# Altium PCB TOP-010.PcbDoc
Units mil, origin at the board's own origin, x right, y up, seen from the top; angles counter-clockwise.
Board outline 1750 x 1750 mil, 2 copper layers (L1 - Top Layer, L4 - Bottom Layer), stack 62.8 mil thick; 2 components, 39 nets, 128 pads, 92 vias.
Unrouted connection lines stored in the file: 4.
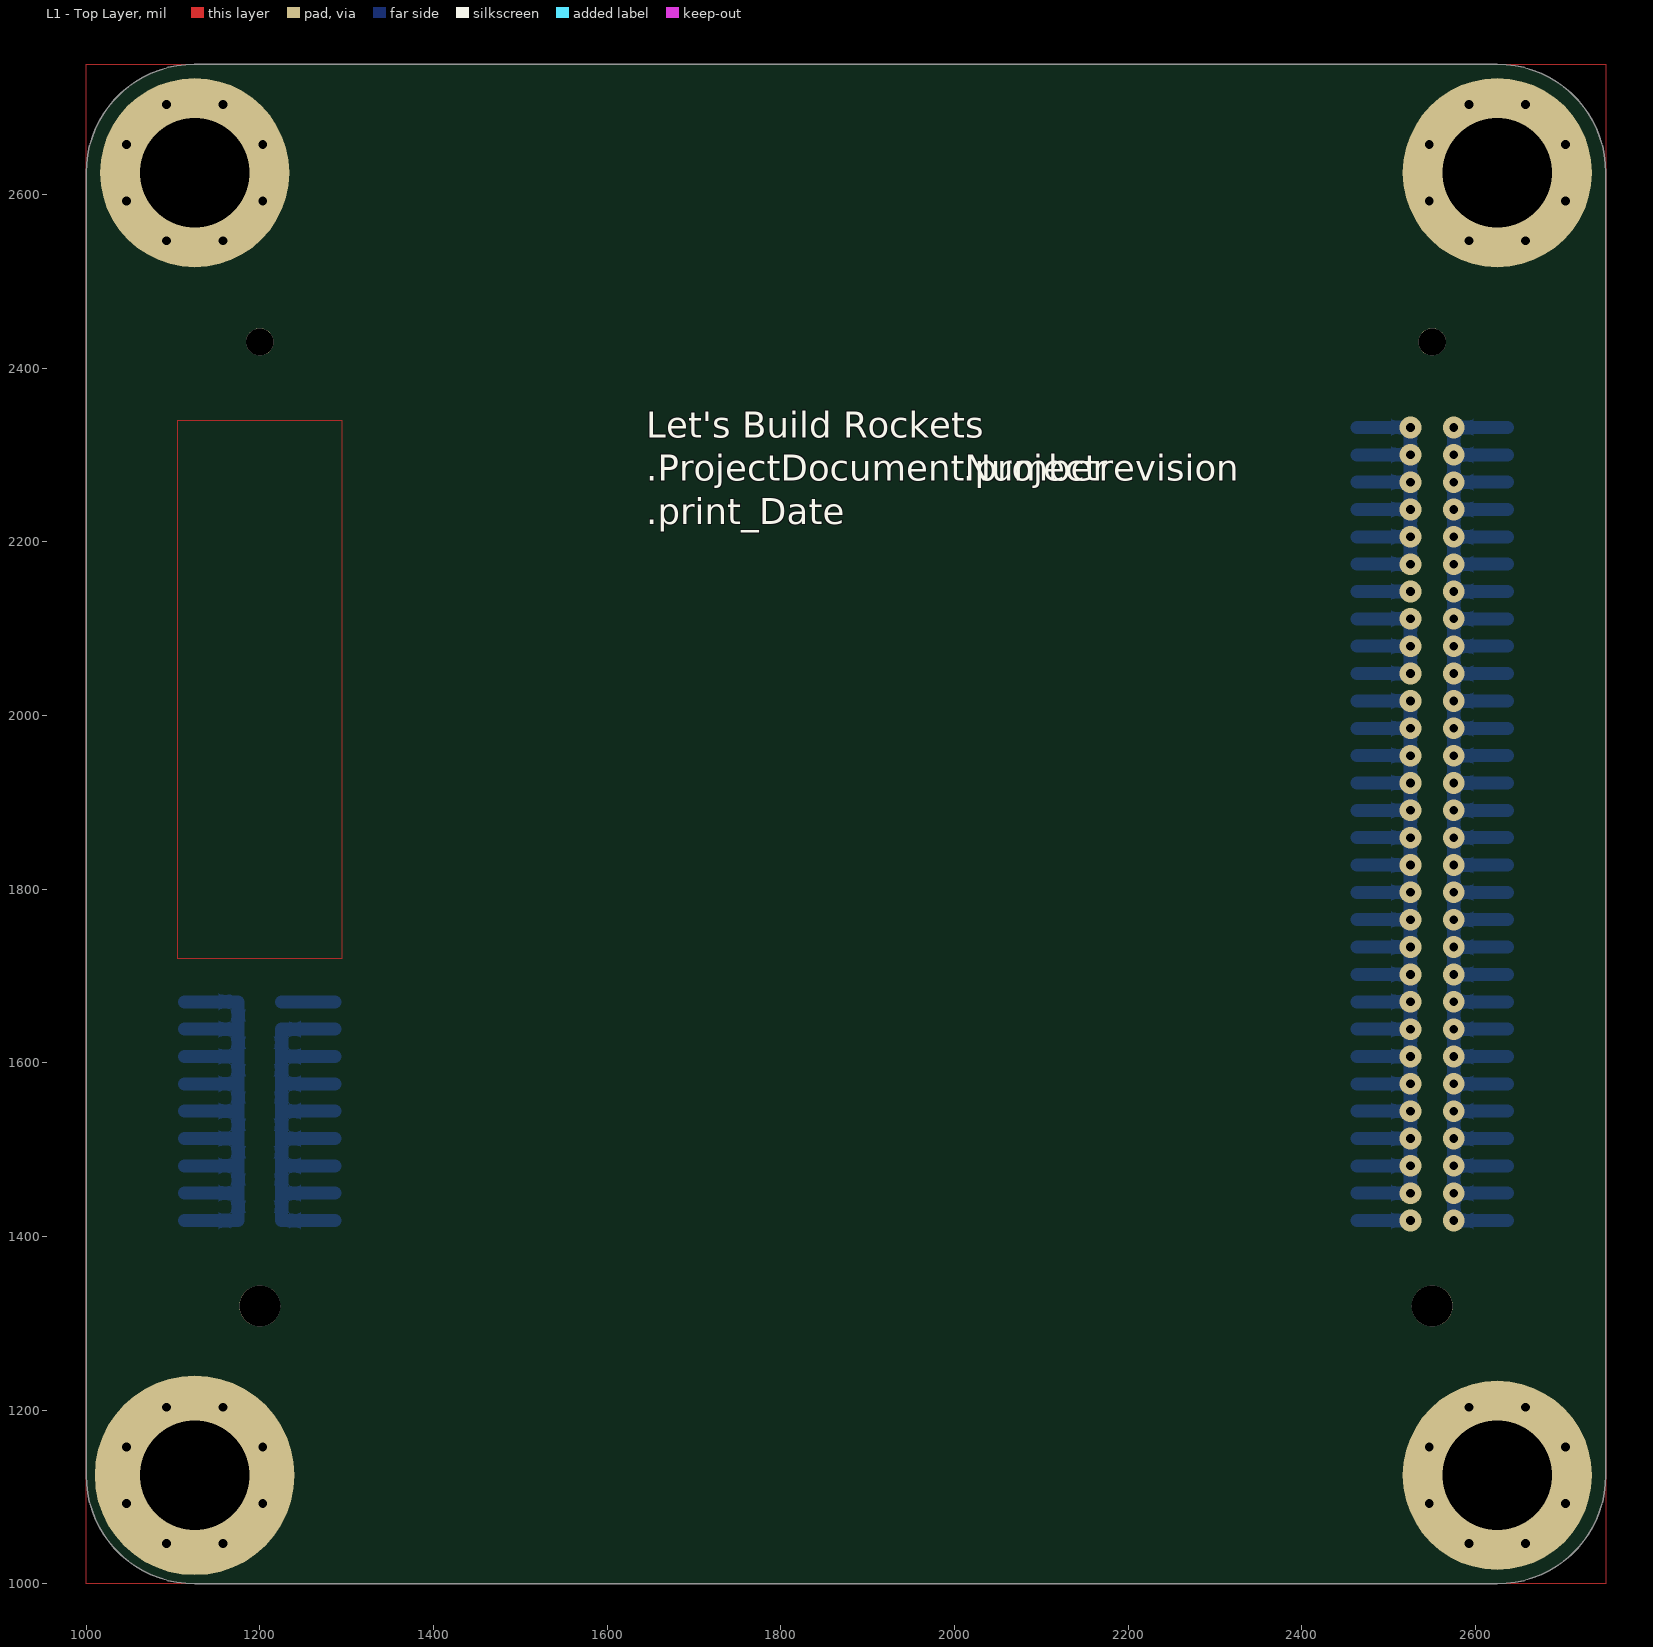
[diagram p0: L1 - Top Layer view]
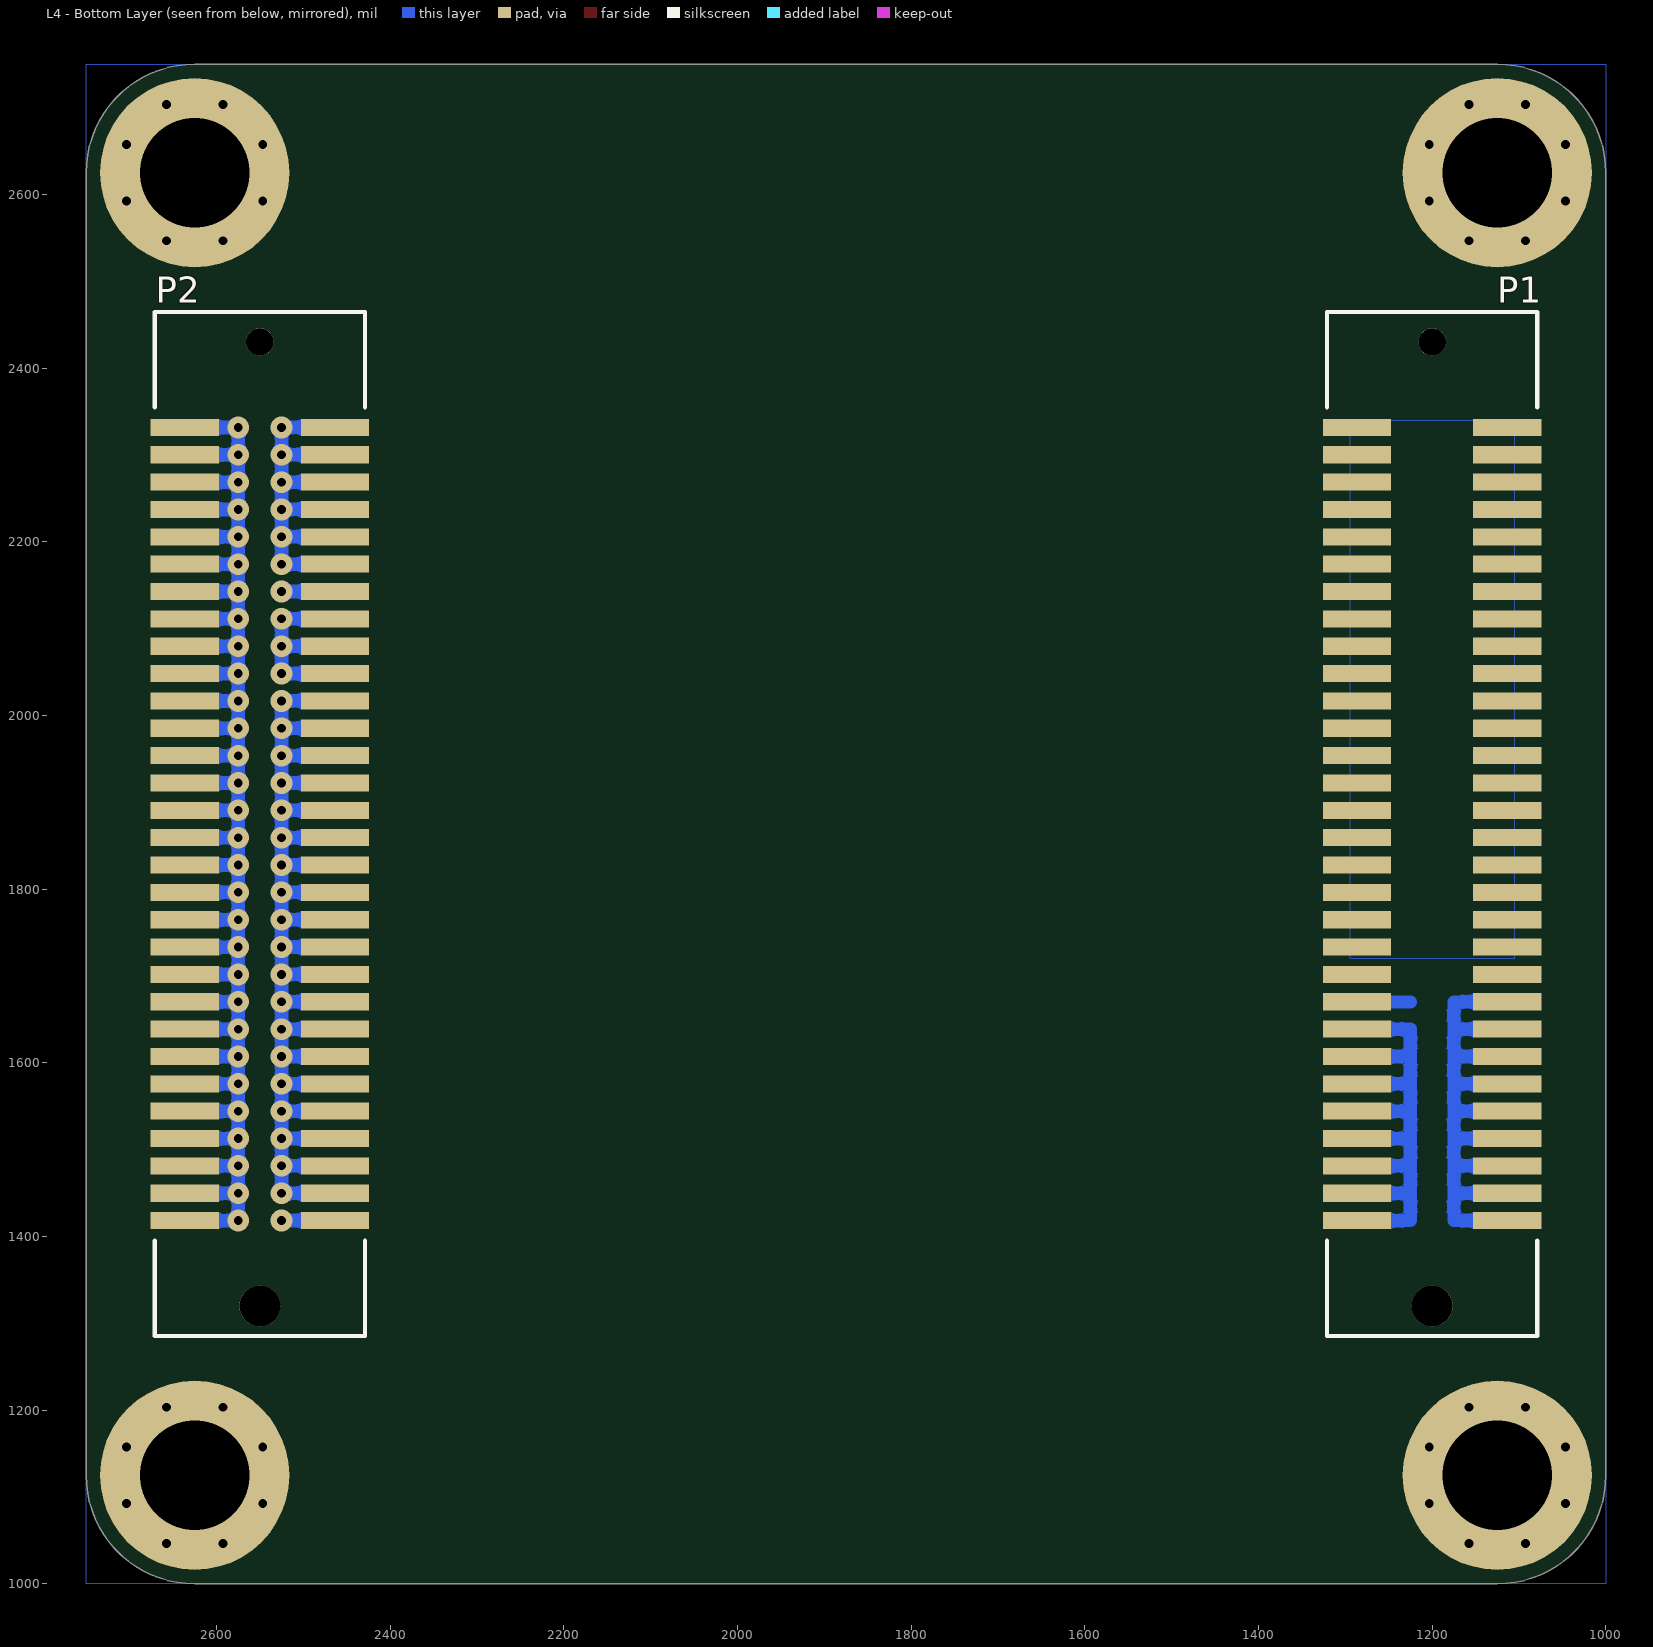
[diagram p1: L4 - Bottom Layer view, seen from below]

## Layer stack, top to bottom
Top Solder: solder mask 0.5, Solder Resist, Dk 3.8
L1 - Top Layer: signal copper 1.4
Dielectric 1: core 60, Core-043, Dk 4.3
L4 - Bottom Layer: signal copper 1.4
Bottom Solder: solder mask 0.5, Solder Resist, Dk 3.8

## Board outline
1000,1125 1000,2625 cw(c1125,2625) 1125,2750 2625,2750 cw(c2625,2625) 2750,2625 2750,1125 cw(c2625,1125) 2625,1000 1125,1000 cw(c1125,1125)

## Design rules (kind name [scope] priority, off if disabled: settings)
AssemblyTestPointUsage AssemblyTestPointUsage_1 [All] p2:
AssemblyTestpoint AssemblyTestpoint_1 [All] p2: testpointundercomponent=TRUE minsize=40 maxsize=100 preferedsize=60 minholesize=0 maxholesize=40 preferedholesize=32 testpointgrid=1 usegrid=TRUE gridtolerance=0.01 allowsidetop=TRUE allowsidebottom=TRUE
BoardOutlineClearance [All] p1: gap=10 ignorepadtopadclearanceinfootprint=FALSE except(0: Arc-SplitContinuation Track-SplitContinuation SMDPad-SplitContinuation THPad-SplitContinuation Via-SplitContinuation Fill-SplitContinuation Poly-SplitContinuation Region-SplitContinuation Text-SplitContinuation)
Clearance Clearance_HV [InNetClass('HIghVoltage')] p1: gap=6 ignorepadtopadclearanceinfootprint=FALSE except(10: Arc-Poly Track-Poly SMDPad-Poly THPad-Poly Via-Poly Fill-Poly Poly-Poly Poly-Region Poly-Text Poly-Hole)
Clearance [All] p2: gap=5 ignorepadtopadclearanceinfootprint=FALSE except(8: Arc-Poly Track-Poly SMDPad-Poly THPad-Poly Via-Poly Fill-Poly Poly-Poly Poly-Region Poly-Text Poly-Hole)
DiffPairsRouting [All] p1: maxlimit=5 minlimit=5 mostfreqgap=5 toplayer_minwidth=5 toplayer_maxwidth=5 toplayer_prefwidth=5 bottomlayer_minwidth=5 bottomlayer_maxwidth=5 bottomlayer_prefwidth=5 impedanceprofiledriven=TRUE impedanceprofileid={FBA8A629-7972-4F76-A7E5-5756DC662DF8} impedanceprofilevalue=100.000000 maxuncoupledlength=500
FabricationTestPointUsage FabricationTestPointUsage_1 [All] p2: valid=0 allowmultiple=FALSE
FabricationTestpoint FabricationTestpoint_1 [All] p2: side=3 testpointundercomponent=TRUE minsize=40 maxsize=100 preferedsize=60 minholesize=0 maxholesize=40 preferedholesize=32 testpointgrid=1 allowsidetop=TRUE allowsidebottom=TRUE usegrid=TRUE gridtolerance=0.01
FanoutControl Fanout_LCC [IsLCC] p1: bgadir=Out bgaviamode=Centered fanoutstyle=Auto fanoutdirection=Alternating viagrid=1 // Fanout_LCC (Default Rule)
FanoutControl Fanout_BGA [IsBGA] p2: bgadir=Out bgaviamode=Centered fanoutstyle=Auto fanoutdirection=Alternating viagrid=1 // Fanout_BGA (Default Rule)
FanoutControl Fanout_Default [All] p4: bgadir=Out bgaviamode=Centered fanoutstyle=Auto fanoutdirection=Alternating viagrid=1 // Fanout_Default (Default Rule)
FanoutControl Fanout_Small [(CompPinCount < 5)] p5: bgadir=Out bgaviamode=Centered fanoutstyle=Auto fanoutdirection=OutThenIn viagrid=1 // Fanout_Small (Default Rule)
FanoutControl Fanout_BGA_1 [IsBGA] p6: bgadir=Out bgaviamode=Centered fanoutstyle=Auto fanoutdirection=Alternating viagrid=1 // Fanout_BGA (Default Rule)
FanoutControl Fanout_LCC_1 [IsLCC] p7: bgadir=Out bgaviamode=Centered fanoutstyle=Auto fanoutdirection=Alternating viagrid=1 // Fanout_LCC (Default Rule)
FanoutControl Fanout_SOIC_1 [IsSOIC] p8: bgadir=Out bgaviamode=Centered fanoutstyle=Auto fanoutdirection=Alternating viagrid=1 // Fanout_SOIC (Default Rule)
FanoutControl Fanout_Small_1 [(CompPinCount < 5)] p9: bgadir=Out bgaviamode=Centered fanoutstyle=Auto fanoutdirection=OutThenIn viagrid=1 // Fanout_Small (Default Rule)
FanoutControl Fanout_Default_1 [All] p10: bgadir=Out bgaviamode=Centered fanoutstyle=Auto fanoutdirection=Alternating viagrid=1 // Fanout_Default (Default Rule)
Height Height_Bottom [TouchesRoom('BoardHeight_Bottom') and OnBottom and not ((Name='J1') or (Name='J2') or (Name='P1') or (Name='P2') )] p1: minheight=0 maxheight=152 prefheight=0
Height Height_Top [TouchesRoom('BoardHeight_Top') and OnTop and not ((Name='J1') or (Name='J2') or (Name='P1') or (Name='P2') )] p2: minheight=0 maxheight=310 prefheight=0
HoleSize [All] p1: absolutevalues=TRUE maxlimit=130 minlimit=10 maxpercent=80.000 minpercent=20.000
MinimumSolderMaskSliver [All] p1: minsoldermaskwidth=3
PlaneClearance [All] p1: clearance=10
PlaneConnect [All] p1: pad.planeconnectstyle=Relief pad.reliefexpansion=10 pad.reliefentries=4 pad.reliefconductorwidth=10 pad.reliefairgap=10 via.planeconnectstyle=Direct via.reliefexpansion=20 via.reliefentries=4 via.reliefconductorwidth=10 via.reliefairgap=10
PolygonConnect [All] p1: thpad.connectstyle=Relief thpad.reliefconductorwidth=10 thpad.reliefentries=4 thpad.polygonreliefangle="90 Angle" thpad.airgapwidth=10 smdpad.connectstyle=Relief smdpad.reliefconductorwidth=9 smdpad.reliefentries=4 smdpad.polygonreliefangle="90 Angle" smdpad.airgapwidth=5 via.connectstyle=Direct via.reliefconductorwidth=10 via.reliefentries=4 via.polygonreliefangle="90 Angle" via.airgapwidth=10
RoomDefinition BoardHeight_Top [False] p1: confinementstyle=ConfineIn formatcopy=TRUE lockcomponents=FALSE outline 2750,2750 1000,2750 1000,1000 2750,1000
RoomDefinition BoardHeight_Bottom [False] p2: confinementstyle=ConfineIn formatcopy=TRUE lockcomponents=FALSE outline 1000,2750 2750,2750 2750,1000 1000,1000
RoutingVias [All] p1: holewidth=10 width=25 viastyle="Through Hole" minholewidth=10 minwidth=25 maxholewidth=28 maxwidth=50
SilkToBoardRegionClearance SilkToBoardRegionClearance_1 [All] p2:
SilkToSilkClearance [All] p1: silktosilkclearance=2
SilkToSolderMaskClearance [IsPad] p1: minsilkscreentomaskgap=4 clearancetoexposedcopper=TRUE
SolderMaskExpansion [All] p1: expansion=2 istentingtop=FALSE
UnRoutedNet [All] p1: checkbadconnections=TRUE
Width [All] p1: maxlimit=25 minlimit=5 preferedwidth=10 minimp=50.000000 maximp=50.000000 favimp=50.000000
17 further rules are at their usual default settings.

## Components (designator, comment, footprint, x,y, rotation, side; value= is the part's Value field where it differs from the comment)
P1 "10144518-064802LF" 10144518-064802LF 1200,1875 r270 bottom locked
P2 "10144518-064802LF" 10144518-064802LF 2550,1875 r270 bottom locked

## Footprints (in the part's own frame and the unit in brackets; to place one, negate y for a bottom-side part, rotate by r counter-clockwise, add the part's x,y. Pads: shape width x height; smd on the part's side, far side on the other; paste and mask are expansions set on the pad)
10144518-064802LF [mm]
  rect 0.5x2 smd: 1(-11.6,2.2) 2(-11.6,-2.2) 3(-10.8,2.2) 4(-10.8,-2.2) 5(-10,2.2) 6(-10,-2.2) 7(-9.2,2.2) 8(-9.2,-2.2) 9(-8.4,2.2) 10(-8.4,-2.2) 11(-7.6,2.2) 12(-7.6,-2.2) 13(-6.8,2.2) 14(-6.8,-2.2) 15(-6,2.2) 16(-6,-2.2) 17(-5.2,2.2) 18(-5.2,-2.2) 19(-4.4,2.2) 20(-4.4,-2.2) 21(-3.6,2.2) 22(-3.6,-2.2) 23(-2.8,2.2) 24(-2.8,-2.2) 25(-2,2.2) 26(-2,-2.2) 27(-1.2,2.2) 28(-1.2,-2.2) 29(-0.4,2.2) 30(-0.4,-2.2) 31(0.4,2.2) 32(0.4,-2.2) 33(1.2,2.2) 34(1.2,-2.2) 35(2,2.2) 36(2,-2.2) 37(2.8,2.2) 38(2.8,-2.2) 39(3.6,2.2) 40(3.6,-2.2) 41(4.4,2.2) 42(4.4,-2.2) 43(5.2,2.2) 44(5.2,-2.2) 45(6,2.2) 46(6,-2.2) 47(6.8,2.2) 48(6.8,-2.2) 49(7.6,2.2) 50(7.6,-2.2) 51(8.4,2.2) 52(8.4,-2.2) 53(9.2,2.2) 54(9.2,-2.2) 55(10,2.2) 56(10,-2.2) 57(10.8,2.2) 58(10.8,-2.2) 59(11.6,2.2) 60(11.6,-2.2)
  round 0.8 hole 0.8 unplated: M1(-14.1,0)
  round 1.2 hole 1.2 unplated: M2(14.1,0)
  silkscreen extent -14.97,-3.08 14.97,3.08, body extent -14.9,-3 14.9,3, height 7.65

## Part data
P1 P2: Unit Price (USD)=1.52

## Free pads (board coordinates)
  round 230 / inner round 218 / far side round 218 hole 125.98: 0(1125,1125)
  round 218 hole 125.98: 0(1125,2625) 0(2625,1125) 0(2625,2625)

## Via types
v1: diameter 25, hole 10, L1 - Top Layer to L4 - Bottom Layer, tented both sides, 92 vias

## Nets (pads, with @x,y where several pads share a name; then routed paths per layer and width w, separated by ;. In a path a pad name is that pad's centre, name@x,y a point inside that pad or via, vN(x,y) a via of type N, cw(c..) or ccw(c..) an arc to the next point about the centre after c; other vN are vias at no path point)
+0.9V_REF: P1.42
+5V: P1.46 P1.48 P1.50 P1.52 P1.54 P1.56 P1.58 P1.60 | length 713.4
  L4 - Bottom Layer w15: P1.60 1225,1418.31 1225,1449.8 ; P1.58 1225,1449.8 ; P1.56 1225,1481.3 ; P1.54 1225,1512.8 ; P1.52 1225,1544.29 ; P1.50 1225,1575.79 ; P1.48 1225,1607.28 ; P1.46 1225,1638.78 1225,1607.28 ; 1225,1449.8 1225,1481.3 ; 1225,1481.3 1225,1512.8 ; 1225,1512.8 1225,1544.29 ; 1225,1544.29 1225,1575.79 ; 1225,1575.79 1225,1607.28
+5V_BOOTSTRAP: P1.44 | length 61.6
  L4 - Bottom Layer w15: 1225,1670.28 P1.44
+5V_Preboot: P1.25
+12V: P2.1 P2.3 P2.5 P2.7 P2.9 P2.11 P2.13 P2.15 P2.17 P2.19 | length 836.6
  L4 - Bottom Layer w15: P2.19 v1(2525,2048.23) v1(2525,2079.72) ; P2.17 v1(2525,2079.72) ; P2.15 v1(2525,2111.22) v1(2525,2079.72) ; P2.13 v1(2525,2142.72) ; P2.11 v1(2525,2174.21) v1(2525,2205.71) ; P2.9 v1(2525,2205.71) ; P2.7 v1(2525,2237.2) ; P2.5 v1(2525,2268.7) ; P2.3 v1(2525,2300.2) ; P2.1 v1(2525,2331.69) v1(2525,2300.2) ; v1(2525,2205.71) v1(2525,2237.2) ; v1(2525,2237.2) v1(2525,2268.7) ; v1(2525,2268.7) v1(2525,2300.2)
+VBAT: P2.21 P2.23 P2.25 P2.27 P2.29 P2.31 P2.33 P2.35 P2.37 P2.39 P2.41 P2.43 P2.45 P2.47 P2.49 P2.51 P2.53 P2.55 P2.57 | length 1737.6
  L4 - Bottom Layer w15: P2.57 v1(2525,1449.8) v1(2525,1481.3) ; P2.55 v1(2525,1481.3) ; P2.53 v1(2525,1512.8) ; P2.51 v1(2525,1544.29) ; P2.49 v1(2525,1575.79) ; P2.47 v1(2525,1607.28) ; P2.45 v1(2525,1638.78) ; P2.43 v1(2525,1670.28) ; P2.41 v1(2525,1701.77) ; P2.39 v1(2525,1733.27) ; P2.37 v1(2525,1764.76) ; P2.35 v1(2525,1796.26) ; P2.33 v1(2525,1827.76) ; P2.31 v1(2525,1859.25) ; P2.29 v1(2525,1890.75) ; P2.27 v1(2525,1922.24) ; P2.25 v1(2525,1953.74) ; P2.23 v1(2525,1985.24) ; P2.21 v1(2525,2016.73) v1(2525,1985.24) ; v1(2525,1481.3) v1(2525,1512.8) ; v1(2525,1512.8) v1(2525,1544.29) ; v1(2525,1544.29) v1(2525,1575.79) ; v1(2525,1575.79) v1(2525,1607.28) ; v1(2525,1607.28) v1(2525,1638.78) ; v1(2525,1638.78) v1(2525,1670.28) ; v1(2525,1670.28) v1(2525,1701.77) ; v1(2525,1701.77) v1(2525,1733.27) ; v1(2525,1733.27) v1(2525,1764.76) ; v1(2525,1764.76) v1(2525,1796.26) ; v1(2525,1796.26) v1(2525,1827.76) ; v1(2525,1827.76) v1(2525,1859.25) ; v1(2525,1859.25) v1(2525,1890.75) ; v1(2525,1890.75) v1(2525,1922.24) ; v1(2525,1922.24) v1(2525,1953.74) ; v1(2525,1953.74) v1(2525,1985.24)
+VBAT_Preboot: P2.59 | length 61.6
  L4 - Bottom Layer w15: P2.59 v1(2525,1418.31)
CAN0_N: P1.4
CAN0_P: P1.6
CAN1_N: P1.10
CAN1_P: P1.12
CTRL_SYNC: P1.26
DETECT: P1.32
DRAIN: P1.1 P1.2 P1.8 P1.14 P1.20 P1.24 P1.27 P1.28 P1.39 P1.40 pad.0
  other v1: 1092.47,1046.47 1157.53,1046.47 2592.47,1046.47 2657.53,1046.47 1046.47,1092.47 1203.53,1092.47 2546.47,1092.47 2703.53,1092.47 1046.47,1157.53 1203.53,1157.53 2546.47,1157.53 2703.53,1157.53 1092.47,1203.53 1157.53,1203.53 2592.47,1203.53 2657.53,1203.53 1092.47,2546.47 1157.53,2546.47 2592.47,2546.47 2657.53,2546.47 1046.47,2592.47 1203.53,2592.47 2546.47,2592.47 2703.53,2592.47 1046.47,2657.53 1203.53,2657.53 2546.47,2657.53 2703.53,2657.53 1092.47,2703.53 1157.53,2703.53 2592.47,2703.53 2657.53,2703.53
EN_0: P1.34
EN_1: P1.36
EN_2: P1.38
GND: P1.43 P1.45 P1.47 P1.49 P1.51 P1.53 P1.55 P1.57 P1.59 P2.2 P2.4 P2.6 P2.8 P2.10 P2.12 P2.14 P2.16 P2.18 P2.20 P2.22 P2.24 P2.26 P2.28 P2.30 P2.32 P2.34 P2.36 P2.38 P2.40 P2.42 P2.44 P2.46 P2.48 P2.50 P2.52 P2.54 P2.56 P2.58 P2.60 | length 3568.3
  L4 - Bottom Layer w15: P1.59 1175,1418.31 1175,1449.8 ; P1.57 1175,1449.8 ; P1.55 1175,1481.3 ; P1.53 1175,1512.8 ; P1.51 1175,1544.29 ; P1.49 1175,1575.79 ; P1.47 1175,1607.28 ; P1.45 1175,1638.78 ; P1.43 1175,1670.28 1175,1638.78 ; P2.60 v1(2575,1418.31) v1(2575,1449.8) ; P2.58 v1(2575,1449.8) ; P2.56 v1(2575,1481.3) ; P2.54 v1(2575,1512.8) ; P2.52 v1(2575,1544.29) ; P2.50 v1(2575,1575.79) ; P2.48 v1(2575,1607.28) ; P2.46 v1(2575,1638.78) ; P2.44 v1(2575,1670.28) ; P2.42 v1(2575,1701.77) ; P2.40 v1(2575,1733.27) ; P2.38 v1(2575,1764.76) ; P2.36 v1(2575,1796.26) ; P2.34 v1(2575,1827.76) ; P2.32 v1(2575,1859.25) ; P2.30 v1(2575,1890.75) ; P2.28 v1(2575,1922.24) ; P2.26 v1(2575,1953.74) ; P2.24 v1(2575,1985.24) ; P2.22 v1(2575,2016.73) ; P2.20 v1(2575,2048.23) ; P2.18 v1(2575,2079.72) ; P2.16 v1(2575,2111.22) ; P2.14 v1(2575,2142.72) ; P2.12 v1(2575,2174.21) ; P2.10 v1(2575,2205.71) ; P2.8 v1(2575,2237.2) ; P2.6 v1(2575,2268.7) ; P2.4 v1(2575,2300.2) ; P2.2 v1(2575,2331.69) v1(2575,2300.2) ; 1175,1449.8 1175,1481.3 ; 1175,1481.3 1175,1512.8 ; 1175,1512.8 1175,1544.29 ; 1175,1544.29 1175,1575.79 ; 1175,1575.79 1175,1607.28 ; 1175,1607.28 1175,1638.78 ; v1(2575,1449.8) v1(2575,1481.3) ; v1(2575,1481.3) v1(2575,1512.8) ; v1(2575,1512.8) v1(2575,1544.29) ; v1(2575,1544.29) v1(2575,1575.79) ; v1(2575,1575.79) v1(2575,1607.28) ; v1(2575,1607.28) v1(2575,1638.78) ; v1(2575,1638.78) v1(2575,1670.28) ; v1(2575,1670.28) v1(2575,1701.77) ; v1(2575,1701.77) v1(2575,1733.27) ; v1(2575,1733.27) v1(2575,1764.76) ; v1(2575,1764.76) v1(2575,1796.26) ; v1(2575,1796.26) v1(2575,1827.76) ; v1(2575,1827.76) v1(2575,1859.25) ; v1(2575,1859.25) v1(2575,1890.75) ; v1(2575,1890.75) v1(2575,1922.24) ; v1(2575,1922.24) v1(2575,1953.74) ; v1(2575,1953.74) v1(2575,1985.24) ; v1(2575,1985.24) v1(2575,2016.73) ; v1(2575,2016.73) v1(2575,2048.23) ; v1(2575,2048.23) v1(2575,2079.72) ; v1(2575,2079.72) v1(2575,2111.22) ; v1(2575,2111.22) v1(2575,2142.72) ; v1(2575,2142.72) v1(2575,2174.21) ; v1(2575,2174.21) v1(2575,2205.71) ; v1(2575,2205.71) v1(2575,2237.2) ; v1(2575,2237.2) v1(2575,2268.7) ; v1(2575,2268.7) v1(2575,2300.2)
I2C_SCL: P1.18
I2C_SDA: P1.16
P_GOOD: P1.30
PPS: P1.22
QSPI_CLK: P1.29
QSPI_IO0: P1.31
QSPI_IO1: P1.33
QSPI_IO2: P1.35
QSPI_IO3: P1.37
RFU_3: P1.3
RFU_5: P1.5
RFU_7: P1.7
RFU_9: P1.9
RFU_11: P1.11
RFU_13: P1.13
RFU_15: P1.15
RFU_17: P1.17
RFU_19: P1.19
RFU_21: P1.21
RFU_23: P1.23
SYNC_0: P1.41
pads on no net: P1.M1 P1.M2 P2.M1 P2.M2

## Polygon pours and split planes (outlines as drawn)
GND on L1 - Top Layer "Top Layer-GND" (solid, remove dead copper, shelved, pour order 18): 1000,2750 2750,2750 2750,1000 1000,1000
DRAIN on L1 - Top Layer "Top Layer-DRAIN" (solid, remove dead copper, shelved, pour order 8): 1105.51,2340 1294.49,2340 1294.49,1720 1105.51,1720
GND on L4 - Bottom Layer "Bottom Layer-GND" (solid, remove dead copper, shelved, pour order 21): 2750,2750 1000,2750 1000,1000 2750,1000
DRAIN on L4 - Bottom Layer "Bottom Layer-DRAIN" (solid, remove dead copper, shelved, pour order 7): 1294.49,2340 1105.51,2340 1105.51,1720 1294.49,1720

## Silkscreen, mask and mechanical layers (free items; w line width, h text height)
Top Overlay:
  text "Let's Build Rockets" at 1645,2320 h30
  text ".ProjectDocumentNumber" at 1645,2270 h30
  text ".projectrevision" at 2010,2270 h30
  text ".print_Date" at 1645,2220 h30
Outline:
  the board outline again, w5